# Altium PCB MCU_FOR_DOWNLOAD_V6_8_PCS.PcbDoc (part 2 of 4)
Units mil, origin at the board's own origin, x right, y up, seen from the top; angles counter-clockwise.
Board outline 4834.06 x 3482.15 mil, 4 copper layers (Top, GND1, GND2, Bottom), stack 35.4 mil thick; 280 components, 38 nets, 1144 pads, 944 vias.
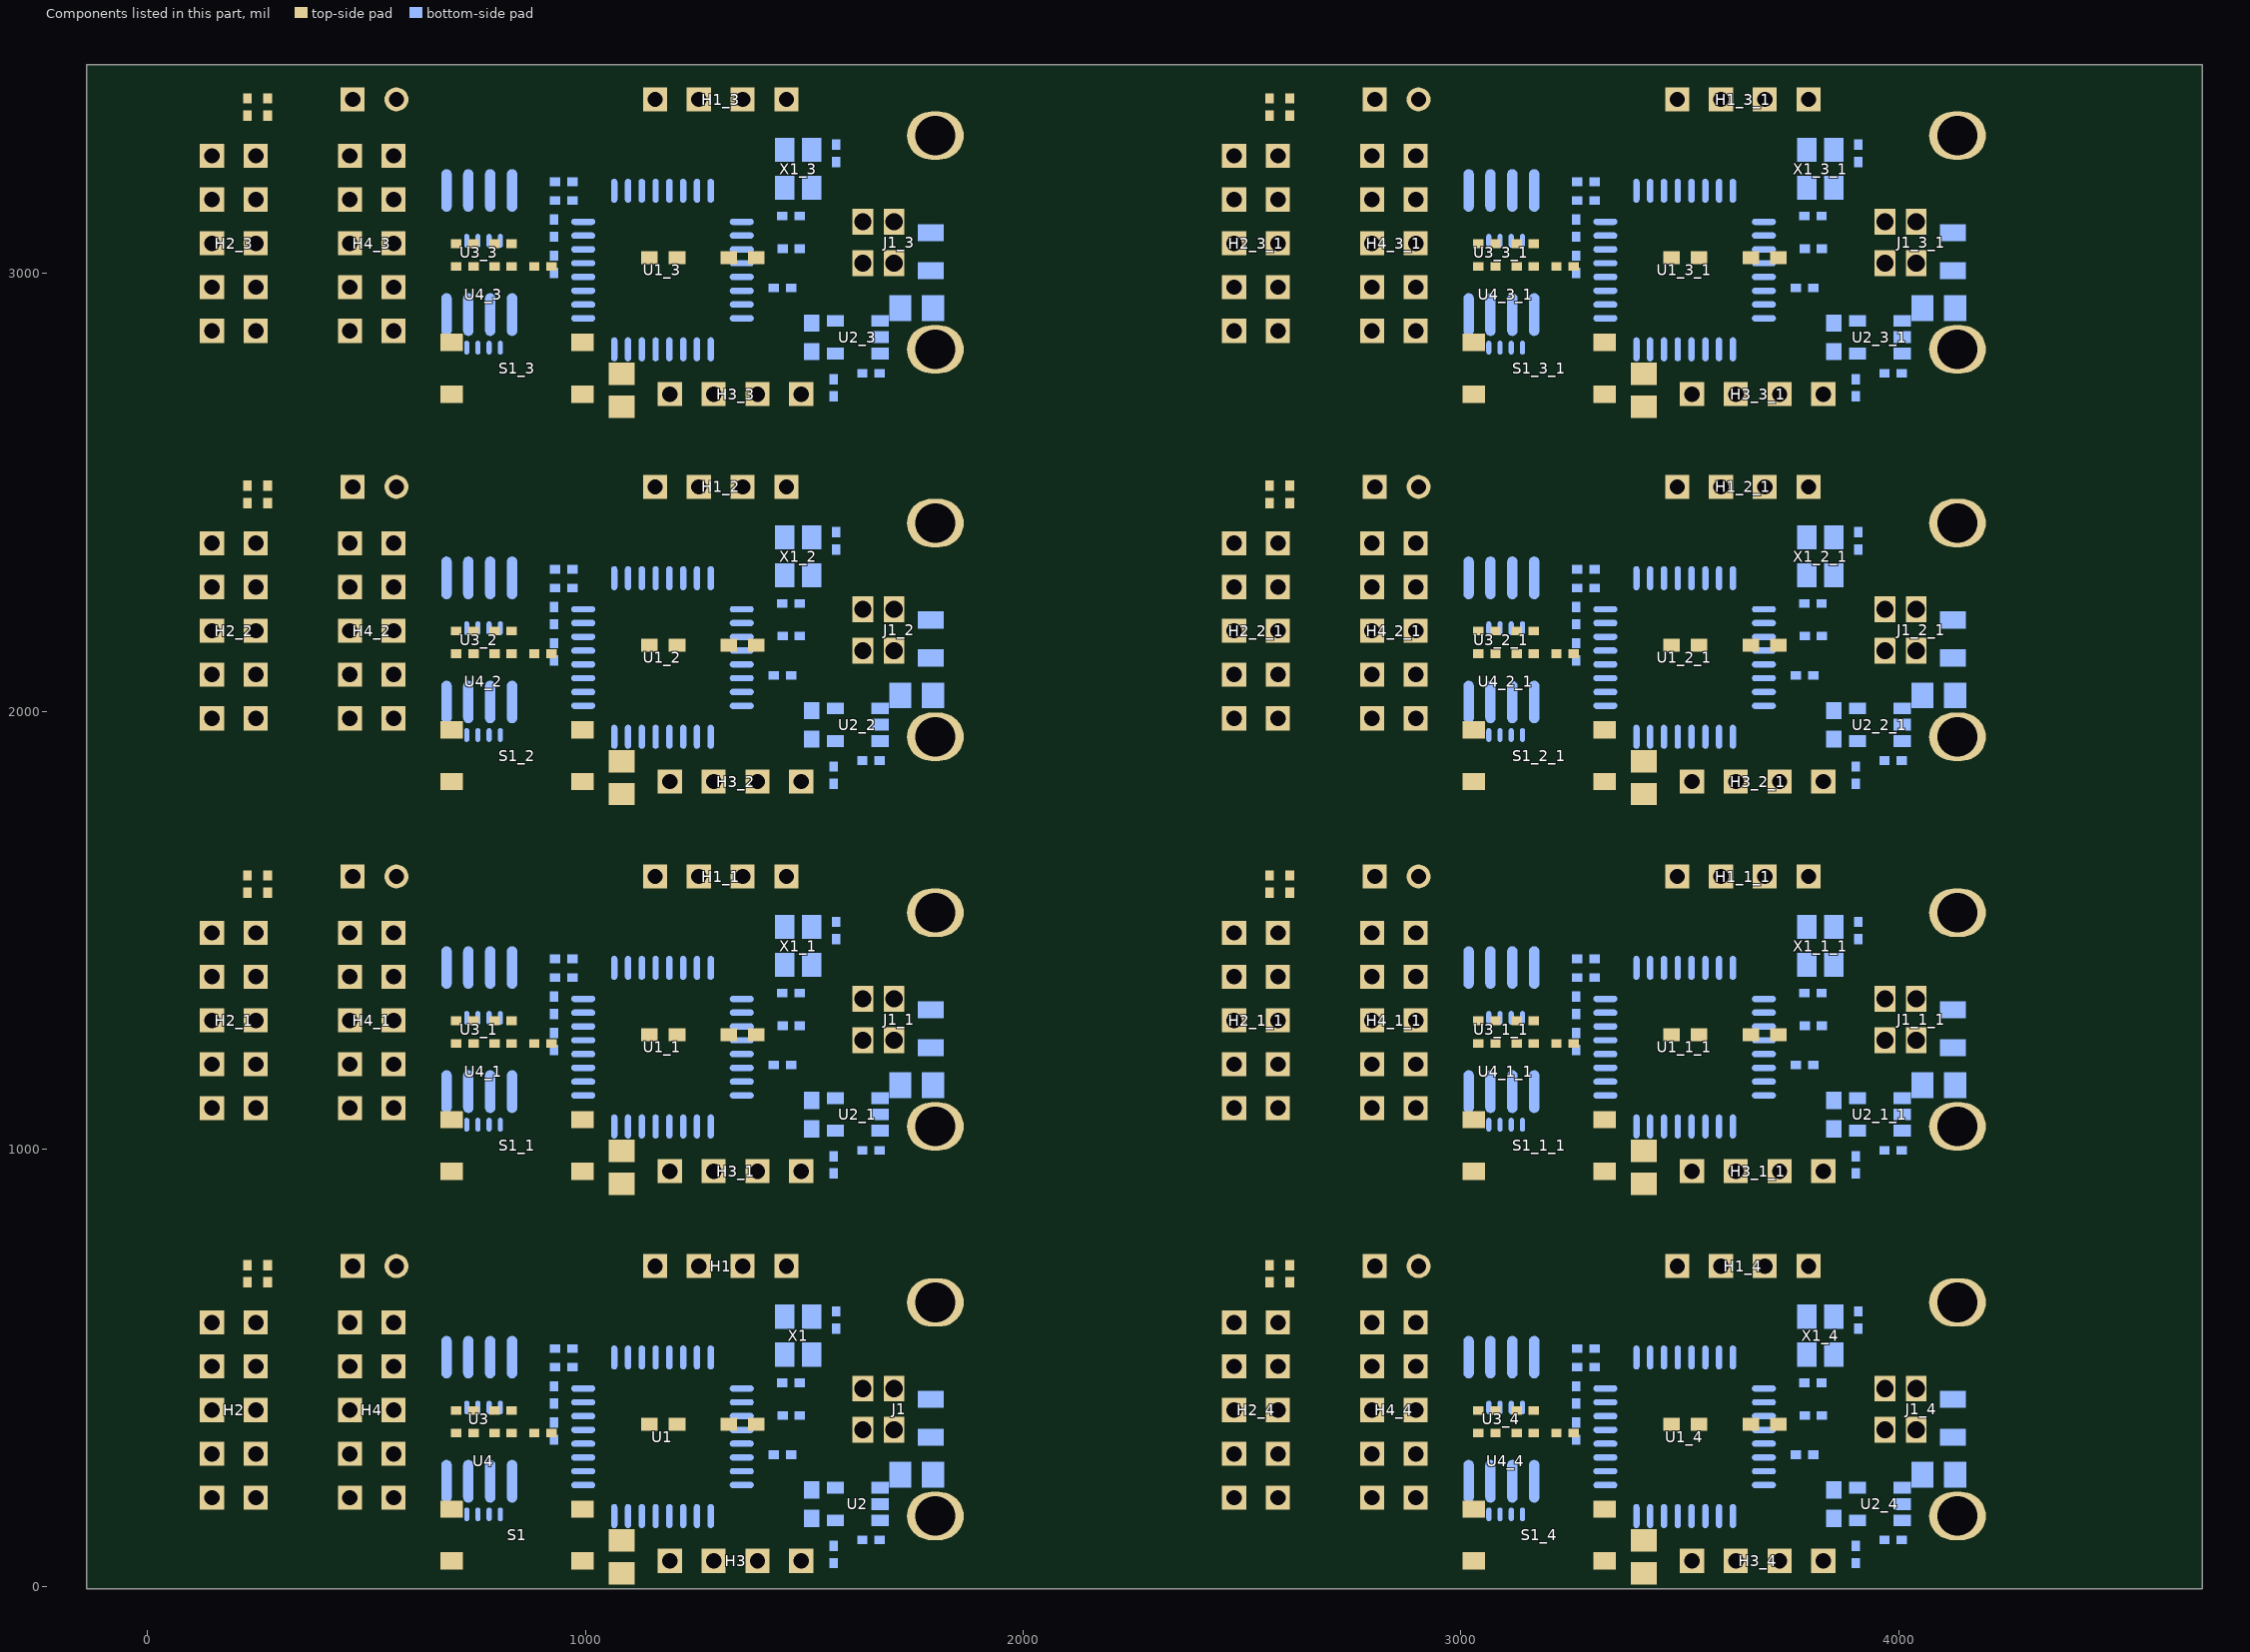
[diagram p2: the components of this part, seen from the top]

## Via types
v1: diameter 16/16/16/16 (per signal layer), hole 8, Top to Bottom, 936 vias
v2: diameter 55/55/55/55 (per signal layer), hole 37, Top to Bottom, 8 vias

## Nets (pads, with @x,y where several pads share a name; then routed paths per layer and width w, separated by ;. In a path a pad name is that pad's centre, name@x,y a point inside that pad or via, vN(x,y) a via of type N, cw(c..) or ccw(c..) an arc to the next point about the centre after c; other vN are vias at no path point) (continued)
copper on no net: | length 208596.2
  Top w7.87: v1(41.34,1641.97) 79.53,1680.16 644.09,1680.16 648.03,1676.22 v1(648.03,1673.07) ; v1(41.34,2531.97) 79.53,2570.16 644.09,2570.16 648.03,2566.22 v1(648.03,2563.07) ; v1(41.34,3416.97) 79.53,3455.16 644.09,3455.16 648.03,3451.22 v1(648.03,3448.07) ; 67.32,1585.28 69.69,1585.28 ; 67.32,2475.28 69.69,2475.28 ; 67.32,3360.28 69.69,3360.28 ; 146.85,1093.54 194.88,1141.57 329.92,1141.57 422.44,1049.06 594.49,1049.06 656.3,1110.87 1048.03,1110.87 v1(1074.41,1084.49) ; 146.85,1193.54 146.85,1194.72 192.52,1240.39 322.34,1240.39 409.45,1153.29 605.02,1153.29 617.32,1140.98 1081.69,1140.98 v1(1127.95,1094.72) ; 146.85,1493.54 149.2,1493.54 203.54,1439.2 203.54,1437.24 292.52,1437.24 314.57,1415.2 314.57,1344.33 425.59,1233.31 597.05,1233.31 674.8,1155.55 1155.71,1155.55 v1(1222.44,1088.82) ; 146.85,1983.54 194.88,2031.57 329.92,2031.57 422.44,1939.06 594.49,1939.06 656.3,2000.87 1048.03,2000.87 v1(1074.41,1974.49) ; 146.85,2083.54 146.85,2084.72 192.52,2130.39 322.34,2130.39 409.45,2043.29 605.02,2043.29 617.32,2030.98 1081.69,2030.98 v1(1127.95,1984.72) ; 146.85,2383.54 149.2,2383.54 203.54,2329.2 203.54,2327.24 292.52,2327.24 314.57,2305.2 314.57,2234.33 425.59,2123.31 597.05,2123.31 674.8,2045.55 1155.71,2045.55 v1(1222.44,1978.82) ; 146.85,2868.54 194.88,2916.57 329.92,2916.57 422.44,2824.06 594.49,2824.06 656.3,2885.87 1048.03,2885.87 v1(1074.41,2859.49) ; 146.85,2968.54 146.85,2969.72 192.52,3015.39 322.34,3015.39 409.45,2928.29 605.02,2928.29 617.32,2915.98 1081.69,2915.98 v1(1127.95,2869.72) ; 146.85,3268.54 149.2,3268.54 203.54,3214.2 203.54,3212.24 292.52,3212.24 314.57,3190.2 314.57,3119.33 425.59,3008.31 597.05,3008.31 674.8,2930.55 1155.71,2930.55 v1(1222.44,2863.82) ; v1(196.85,1054.96) 202.76,1054.96 238.58,1019.13 622.83,1019.13 v1@648.83,1045.13 ; v1(196.85,1944.96) 202.76,1944.96 238.58,1909.13 622.83,1909.13 v1@648.83,1935.13 ; v1(196.85,2829.96) 202.76,2829.96 238.58,2794.13 622.83,2794.13 v1@648.83,2820.13 ; 227.95,1624.65 274.02,1624.65 251.18,1601.81 251.18,1501.02 246.85,1496.69 246.85,1493.54 ; 227.95,2514.65 274.02,2514.65 251.18,2491.81 251.18,2391.02 246.85,2386.69 246.85,2383.54 ; 227.95,3399.65 274.02,3399.65 251.18,3376.81 251.18,3276.02 246.85,3271.69 246.85,3268.54 ; 246.85,1093.54 251.68,1093.54 255.02,1090.2 257.58,1090.2 314.17,1033.6 600.39,1033.6 663.78,1096.99 1025.89,1096.99 1059.65,1063.23 1135.33,1063.23 1156.59,1084.49 1156.99,1084.49 1156.99,1088.33 v1(1159.45,1090.79) ; 246.85,1193.54 327.17,1193.54 327.36,1193.74 385.83,1135.28 599.21,1135.28 609.06,1125.43 1063.78,1125.43 v1(1096.46,1092.76) ; 246.85,1983.54 251.68,1983.54 255.02,1980.2 257.58,1980.2 314.17,1923.6 600.39,1923.6 663.78,1986.99 1025.89,1986.99 1059.65,1953.23 1135.33,1953.23 1156.59,1974.49 1156.99,1974.49 1156.99,1978.33 v1(1159.45,1980.79) ; 246.85,2083.54 327.17,2083.54 327.36,2083.74 385.83,2025.28 599.21,2025.28 609.06,2015.43 1063.78,2015.43 v1(1096.46,1982.76) ; 246.85,2868.54 251.68,2868.54 255.02,2865.2 257.58,2865.2 314.17,2808.6 600.39,2808.6 663.78,2871.99 1025.89,2871.99 1059.65,2838.23 1135.33,2838.23 1156.59,2859.49 1156.99,2859.49 1156.99,2863.33 v1(1159.45,2865.79) ; 246.85,2968.54 327.17,2968.54 327.36,2968.74 385.83,2910.28 599.21,2910.28 609.06,2900.43 1063.78,2900.43 v1(1096.46,2867.76) ; 274.02,1585.28 316.14,1585.28 381.89,1519.53 381.89,1374.25 411.42,1344.72 v1(600.39,1344.72) 701.97,1243.15 701.97,1241.18 701.97,1232.52 706.5,1227.99 ; 274.02,2475.28 316.14,2475.28 381.89,2409.53 381.89,2264.25 411.42,2234.72 v1(600.39,2234.72) 701.97,2133.15 701.97,2131.18 701.97,2122.52 706.5,2117.99 ; 274.02,3360.28 316.14,3360.28 381.89,3294.53 381.89,3149.25 411.42,3119.72 v1(600.39,3119.72) 701.97,3018.15 701.97,3016.18 701.97,3007.52 706.5,3002.99 ; 461.81,1493.54 460.63,1493.54 458.27,1491.18 458.86,1490.59 497.24,1452.2 759.45,1452.2 826.77,1384.88 869.29,1384.88 v1(872.05,1382.13) ; 461.81,2383.54 460.63,2383.54 458.27,2381.18 458.86,2380.59 497.24,2342.2 759.45,2342.2 826.77,2274.88 869.29,2274.88 v1(872.05,2272.13) ; 461.81,3268.54 460.63,3268.54 458.27,3266.18 458.86,3265.59 497.24,3227.2 759.45,3227.2 826.77,3159.88 869.29,3159.88 v1(872.05,3157.13) ; v1(692.91,1187.24) 693.31,1187.24 710.63,1169.92 1176.77,1169.92 v1(1185.04,1161.65) ; v1(692.91,1360.47) v1(1149.61,1360.47) ; v1(692.91,2077.24) 693.31,2077.24 710.63,2059.92 1176.77,2059.92 v1(1185.04,2051.65) ; v1(692.91,2250.47) v1(1149.61,2250.47) ; v1(692.91,2962.24) 693.31,2962.24 710.63,2944.92 1176.77,2944.92 v1(1185.04,2936.65) ; v1(692.91,3135.47) v1(1149.61,3135.47) ; 704.72,1241.18 706.5,1239.41 706.5,1227.99 ; 704.72,1292.76 704.72,1320.31 725.2,1340.79 874.8,1340.79 ; 704.72,2131.18 706.5,2129.41 706.5,2117.99 ; 704.72,2182.76 704.72,2210.31 725.2,2230.79 874.8,2230.79 ; 704.72,3016.18 706.5,3014.41 706.5,3002.99 ; 704.72,3067.76 704.72,3095.31 725.2,3115.79 874.8,3115.79 ; 744.09,1241.18 744.09,1292.76 744.09,1313.62 751.18,1320.71 753.54,1320.71 v1(753.94,1321.1) ; 744.09,2131.18 744.09,2182.76 744.09,2203.62 751.18,2210.71 753.54,2210.71 v1(753.94,2211.1) ; 744.09,3016.18 744.09,3067.76 744.09,3088.62 751.18,3095.71 753.54,3095.71 v1(753.94,3096.1) ; v1(783.46,1321.1) 803.15,1321.1 831.5,1292.76 ; v1(783.46,2211.1) 803.15,2211.1 831.5,2182.76 ; v1(783.46,3096.1) 803.15,3096.1 831.5,3067.76 ; v1(791.34,1210.87) 795.67,1206.54 795.67,1206.34 1225.2,1206.34 1261.42,1242.56 1261.42,1295.12 v1(1309.06,1342.76) ; v1(791.34,2100.87) 795.67,2096.54 795.67,2096.34 1225.2,2096.34 1261.42,2132.56 1261.42,2185.12 v1(1309.06,2232.76) ; v1(791.34,2985.87) 795.67,2981.54 795.67,2981.34 1225.2,2981.34 1261.42,3017.56 1261.42,3070.12 v1(1309.06,3117.76) ; 792.13,1241.18 792.13,1242.76 828.74,1279.37 828.74,1291.22 829.12,1291.59 829.12,1291.95 ; 792.13,1292.76 790.55,1292.76 767.5,1269.7 767.5,1240.79 767.13,1191.57 766.54,1188.43 ; 792.13,2131.18 792.13,2132.76 828.74,2169.37 828.74,2181.22 829.12,2181.59 829.12,2181.95 ; 792.13,2182.76 790.55,2182.76 767.5,2159.7 767.5,2130.79 767.13,2081.57 766.54,2078.43 ; 792.13,3016.18 792.13,3017.76 828.74,3054.37 828.74,3066.22 829.12,3066.59 829.12,3066.95 ; 792.13,3067.76 790.55,3067.76 767.5,3044.7 767.5,3015.79 767.13,2966.57 766.54,2963.43 ; 831.5,1241.18 832.28,1240.39 832.28,1238.03 838.39,1231.93 838.39,1230.75 v1(844.49,1224.65) ; 831.5,2131.18 832.28,2130.39 832.28,2128.03 838.39,2121.93 838.39,2120.75 v1(844.49,2114.65) ; 831.5,3016.18 832.28,3015.39 832.28,3013.03 838.39,3006.93 838.39,3005.75 v1(844.49,2999.65) ; 874.8,1241.57 874.8,1340.79 ; 874.8,2131.57 874.8,2230.79 ; 874.8,3016.57 874.8,3115.79 ; v1(893.7,1269.92) 922.44,1241.18 ; v1(893.7,2159.92) 922.44,2131.18 ; v1(893.7,3044.92) 922.44,3016.18 ; v1(944.88,1069.13) 991.34,1069.13 993.31,1067.17 ; v1(944.88,1959.13) 991.34,1959.13 993.31,1957.17 ; v1(944.88,2844.13) 991.34,2844.13 993.31,2842.17 ; v1(948.82,1265.98) 1143.31,1265.98 1146.17,1263.13 1146.17,1260.87 ; v1(948.82,2155.98) 1143.31,2155.98 1146.17,2153.13 1146.17,2150.87 ; v1(948.82,3040.98) 1143.31,3040.98 1146.17,3038.13 1146.17,3035.87 ; v1(1191.73,1378.98) 1192.52,1378.19 1192.52,1372.68 1160.63,1340.79 874.8,1340.79 ; v1(1191.73,2268.98) 1192.52,2268.19 1192.52,2262.68 1160.63,2230.79 874.8,2230.79 ; v1(1191.73,3153.98) 1192.52,3153.19 1192.52,3147.68 1160.63,3115.79 874.8,3115.79 ; v1(1222.44,1122.28) 1223.62,1123.46 1283.86,1123.46 1309.65,1097.68 1583.27,1097.68 1639.76,1041.18 1640.16,1041.57 v1(1702.76,1041.57) ; v1(1222.44,2012.28) 1223.62,2013.46 1283.86,2013.46 1309.65,1987.68 1583.27,1987.68 1639.76,1931.18 1640.16,1931.57 v1(1702.76,1931.57) ; v1(1222.44,2897.28) 1223.62,2898.46 1283.86,2898.46 1309.65,2872.68 1583.27,2872.68 1639.76,2816.18 1640.16,2816.57 v1(1702.76,2816.57) ; v1(1263.78,1096.69) 1263.39,1082.13 1218.9,1037.64 v1(944.88,1037.64) 660.24,1037.64 649.21,1044.89 v1@648.83,1045.13 ; v1(1263.78,1986.69) 1263.39,1972.13 1218.9,1927.64 v1(944.88,1927.64) 660.24,1927.64 649.21,1934.89 v1@648.83,1935.13 ; v1(1263.78,2871.69) 1263.39,2857.13 1218.9,2812.64 v1(944.88,2812.64) 660.24,2812.64 649.21,2819.89 v1@648.83,2820.13 ; v1(1311.02,1311.26) 1309.45,1312.83 1305.12,1312.83 1301.77,1309.49 1300.98,1309.49 1280.51,1289.02 1280.51,1216.57 1252.36,1188.43 766.54,1188.43 ; v1(1311.02,2201.26) 1309.45,2202.83 1305.12,2202.83 1301.77,2199.49 1300.98,2199.49 1280.51,2179.02 1280.51,2106.57 1252.36,2078.43 766.54,2078.43 ; v1(1311.02,3086.26) 1309.45,3087.83 1305.12,3087.83 1301.77,3084.49 1300.98,3084.49 1280.51,3064.02 1280.51,2991.57 1252.36,2963.43 766.54,2963.43 ; v1(1322.83,1286.06) 1327.27,1281.63 1327.27,1260.87 ; v1(1322.83,2176.06) 1327.27,2171.63 1327.27,2150.87 ; v1(1322.83,3061.06) 1327.27,3056.63 1327.27,3035.87 ; 1390.26,1260.87 1390.26,1262.44 1405.91,1262.44 v1(1425.2,1281.73) ; 1390.26,2150.87 1390.26,2152.44 1405.91,2152.44 v1(1425.2,2171.73) ; 1390.26,3035.87 1390.26,3037.44 1405.91,3037.44 v1(1425.2,3056.73) ; v1(2376.34,751.97) 2414.53,790.16 2979.09,790.16 2983.03,786.22 v1(2983.03,783.07) ; v1(2376.34,1641.97) 2414.53,1680.16 2979.09,1680.16 2983.03,1676.22 v1(2983.03,1673.07) ; v1(2376.34,2531.97) 2414.53,2570.16 2979.09,2570.16 2983.03,2566.22 v1(2983.03,2563.07) ; v1(2376.34,3416.97) 2414.53,3455.16 2979.09,3455.16 2983.03,3451.22 v1(2983.03,3448.07) ; 2402.32,695.28 2404.69,695.28 ; 2402.32,1585.28 2404.69,1585.28 ; 2402.32,2475.28 2404.69,2475.28 ; 2402.32,3360.28 2404.69,3360.28 ; 2481.85,203.54 2529.88,251.57 2664.92,251.57 2757.44,159.06 2929.49,159.06 2991.3,220.87 3383.03,220.87 v1(3409.41,194.49) ; 2481.85,303.54 2481.85,304.72 2527.52,350.39 2657.34,350.39 2744.45,263.29 2940.02,263.29 2952.32,250.98 3416.69,250.98 v1(3462.95,204.72) ; 2481.85,603.54 2484.2,603.54 2538.54,549.2 2538.54,547.24 2627.52,547.24 2649.57,525.2 2649.57,454.33 2760.59,343.31 2932.05,343.31 3009.8,265.55 3490.71,265.55 v1(3557.44,198.82) ; 2481.85,1093.54 2529.88,1141.57 2664.92,1141.57 2757.44,1049.06 2929.49,1049.06 2991.3,1110.87 3383.03,1110.87 v1(3409.41,1084.49) ; 2481.85,1193.54 2481.85,1194.72 2527.52,1240.39 2657.34,1240.39 2744.45,1153.29 2940.02,1153.29 2952.32,1140.98 3416.69,1140.98 v1(3462.95,1094.72) ; 2481.85,1493.54 2484.2,1493.54 2538.54,1439.2 2538.54,1437.24 2627.52,1437.24 2649.57,1415.2 2649.57,1344.33 2760.59,1233.31 2932.05,1233.31 3009.8,1155.55 3490.71,1155.55 v1(3557.44,1088.82) ; 2481.85,1983.54 2529.88,2031.57 2664.92,2031.57 2757.44,1939.06 2929.49,1939.06 2991.3,2000.87 3383.03,2000.87 v1(3409.41,1974.49) ; 2481.85,2083.54 2481.85,2084.72 2527.52,2130.39 2657.34,2130.39 2744.45,2043.29 2940.02,2043.29 2952.32,2030.98 3416.69,2030.98 v1(3462.95,1984.72) ; 2481.85,2383.54 2484.2,2383.54 2538.54,2329.2 2538.54,2327.24 2627.52,2327.24 2649.57,2305.2 2649.57,2234.33 2760.59,2123.31 2932.05,2123.31 3009.8,2045.55 3490.71,2045.55 v1(3557.44,1978.82) ; 2481.85,2868.54 2529.88,2916.57 2664.92,2916.57 2757.44,2824.06 2929.49,2824.06 2991.3,2885.87 3383.03,2885.87 v1(3409.41,2859.49) ; 2481.85,2968.54 2481.85,2969.72 2527.52,3015.39 2657.34,3015.39 2744.45,2928.29 2940.02,2928.29 2952.32,2915.98 3416.69,2915.98 v1(3462.95,2869.72) ; 2481.85,3268.54 2484.2,3268.54 2538.54,3214.2 2538.54,3212.24 2627.52,3212.24 2649.57,3190.2 2649.57,3119.33 2760.59,3008.31 2932.05,3008.31 3009.8,2930.55 3490.71,2930.55 v1(3557.44,2863.82) ; v1(2531.85,164.96) 2537.76,164.96 2573.58,129.13 2957.83,129.13 v1@2983.83,155.13 ; v1(2531.85,1054.96) 2537.76,1054.96 2573.58,1019.13 2957.83,1019.13 v1@2983.83,1045.13 ; v1(2531.85,1944.96) 2537.76,1944.96 2573.58,1909.13 2957.83,1909.13 v1@2983.83,1935.13 ; v1(2531.85,2829.96) 2537.76,2829.96 2573.58,2794.13 2957.83,2794.13 v1@2983.83,2820.13 ; 2562.95,734.65 2609.02,734.65 2586.18,711.81 2586.18,611.02 2581.85,606.69 2581.85,603.54 ; 2562.95,1624.65 2609.02,1624.65 2586.18,1601.81 2586.18,1501.02 2581.85,1496.69 2581.85,1493.54 ; 2562.95,2514.65 2609.02,2514.65 2586.18,2491.81 2586.18,2391.02 2581.85,2386.69 2581.85,2383.54 ; 2562.95,3399.65 2609.02,3399.65 2586.18,3376.81 2586.18,3276.02 2581.85,3271.69 2581.85,3268.54 ; 2581.85,203.54 2586.68,203.54 2590.02,200.2 2592.58,200.2 2649.17,143.6 2935.39,143.6 2998.78,206.99 3360.89,206.99 3394.65,173.23 3470.33,173.23 3491.59,194.49 3491.99,194.49 3491.99,198.33 v1(3494.45,200.79) ; 2581.85,303.54 2662.17,303.54 2662.36,303.74 2720.83,245.28 2934.21,245.28 2944.06,235.43 3398.78,235.43 v1(3431.46,202.76) ; 2581.85,1093.54 2586.68,1093.54 2590.02,1090.2 2592.58,1090.2 2649.17,1033.6 2935.39,1033.6 2998.78,1096.99 3360.89,1096.99 3394.65,1063.23 3470.33,1063.23 3491.59,1084.49 3491.99,1084.49 3491.99,1088.33 v1(3494.45,1090.79) ; 2581.85,1193.54 2662.17,1193.54 2662.36,1193.74 2720.83,1135.28 2934.21,1135.28 2944.06,1125.43 3398.78,1125.43 v1(3431.46,1092.76) ; 2581.85,1983.54 2586.68,1983.54 2590.02,1980.2 2592.58,1980.2 2649.17,1923.6 2935.39,1923.6 2998.78,1986.99 3360.89,1986.99 3394.65,1953.23 3470.33,1953.23 3491.59,1974.49 3491.99,1974.49 3491.99,1978.33 v1(3494.45,1980.79) ; 2581.85,2083.54 2662.17,2083.54 2662.36,2083.74 2720.83,2025.28 2934.21,2025.28 2944.06,2015.43 3398.78,2015.43 v1(3431.46,1982.76) ; 2581.85,2868.54 2586.68,2868.54 2590.02,2865.2 2592.58,2865.2 2649.17,2808.6 2935.39,2808.6 2998.78,2871.99 3360.89,2871.99 3394.65,2838.23 3470.33,2838.23 3491.59,2859.49 3491.99,2859.49 3491.99,2863.33 v1(3494.45,2865.79) ; 2581.85,2968.54 2662.17,2968.54 2662.36,2968.74 2720.83,2910.28 2934.21,2910.28 2944.06,2900.43 3398.78,2900.43 v1(3431.46,2867.76) ; 2609.02,695.28 2651.14,695.28 2716.89,629.53 2716.89,484.25 2746.42,454.72 v1(2935.39,454.72) 3036.97,353.15 3036.97,351.18 3036.97,342.52 3041.5,337.99 ; 2609.02,1585.28 2651.14,1585.28 2716.89,1519.53 2716.89,1374.25 2746.42,1344.72 v1(2935.39,1344.72) 3036.97,1243.15 3036.97,1241.18 3036.97,1232.52 3041.5,1227.99 ; 2609.02,2475.28 2651.14,2475.28 2716.89,2409.53 2716.89,2264.25 2746.42,2234.72 v1(2935.39,2234.72) 3036.97,2133.15 3036.97,2131.18 3036.97,2122.52 3041.5,2117.99 ; 2609.02,3360.28 2651.14,3360.28 2716.89,3294.53 2716.89,3149.25 2746.42,3119.72 v1(2935.39,3119.72) 3036.97,3018.15 3036.97,3016.18 3036.97,3007.52 3041.5,3002.99 ; 2796.81,603.54 2795.63,603.54 2793.27,601.18 2793.86,600.59 2832.24,562.2 3094.45,562.2 3161.77,494.88 3204.29,494.88 v1(3207.05,492.13) ; 2796.81,1493.54 2795.63,1493.54 2793.27,1491.18 2793.86,1490.59 2832.24,1452.2 3094.45,1452.2 3161.77,1384.88 3204.29,1384.88 v1(3207.05,1382.13) ; 2796.81,2383.54 2795.63,2383.54 2793.27,2381.18 2793.86,2380.59 2832.24,2342.2 3094.45,2342.2 3161.77,2274.88 3204.29,2274.88 v1(3207.05,2272.13) ; 2796.81,3268.54 2795.63,3268.54 2793.27,3266.18 2793.86,3265.59 2832.24,3227.2 3094.45,3227.2 3161.77,3159.88 3204.29,3159.88 v1(3207.05,3157.13) ; v1(3027.91,297.24) 3028.31,297.24 3045.63,279.92 3511.77,279.92 v1(3520.04,271.65) ; v1(3027.91,470.47) v1(3484.61,470.47) ; v1(3027.91,1187.24) 3028.31,1187.24 3045.63,1169.92 3511.77,1169.92 v1(3520.04,1161.65) ; v1(3027.91,1360.47) v1(3484.61,1360.47) ; v1(3027.91,2077.24) 3028.31,2077.24 3045.63,2059.92 3511.77,2059.92 v1(3520.04,2051.65) ; v1(3027.91,2250.47) v1(3484.61,2250.47) ; v1(3027.91,2962.24) 3028.31,2962.24 3045.63,2944.92 3511.77,2944.92 v1(3520.04,2936.65) ; v1(3027.91,3135.47) v1(3484.61,3135.47) ; 3039.72,351.18 3041.5,349.41 3041.5,337.99 ; 3039.72,402.76 3039.72,430.31 3060.2,450.79 3209.8,450.79 ; 3039.72,1241.18 3041.5,1239.41 3041.5,1227.99 ; 3039.72,1292.76 3039.72,1320.31 3060.2,1340.79 3209.8,1340.79 ; 3039.72,2131.18 3041.5,2129.41 3041.5,2117.99 ; 3039.72,2182.76 3039.72,2210.31 3060.2,2230.79 3209.8,2230.79 ; 3039.72,3016.18 3041.5,3014.41 3041.5,3002.99 ; 3039.72,3067.76 3039.72,3095.31 3060.2,3115.79 3209.8,3115.79 ; 3079.09,351.18 3079.09,402.76 3079.09,423.62 3086.18,430.71 3088.54,430.71 v1(3088.94,431.1) ; 3079.09,1241.18 3079.09,1292.76 3079.09,1313.62 3086.18,1320.71 3088.54,1320.71 v1(3088.94,1321.1) ; 3079.09,2131.18 3079.09,2182.76 3079.09,2203.62 3086.18,2210.71 3088.54,2210.71 v1(3088.94,2211.1) ; 3079.09,3016.18 3079.09,3067.76 3079.09,3088.62 3086.18,3095.71 3088.54,3095.71 v1(3088.94,3096.1) ; v1(3118.46,431.1) 3138.15,431.1 3166.5,402.76 ; v1(3118.46,1321.1) 3138.15,1321.1 3166.5,1292.76 ; v1(3118.46,2211.1) 3138.15,2211.1 3166.5,2182.76 ; v1(3118.46,3096.1) 3138.15,3096.1 3166.5,3067.76 ; v1(3126.34,320.87) 3130.67,316.54 3130.67,316.34 3560.2,316.34 3596.42,352.56 3596.42,405.12 v1(3644.06,452.76) ; v1(3126.34,1210.87) 3130.67,1206.54 3130.67,1206.34 3560.2,1206.34 3596.42,1242.56 3596.42,1295.12 v1(3644.06,1342.76) ; v1(3126.34,2100.87) 3130.67,2096.54 3130.67,2096.34 3560.2,2096.34 3596.42,2132.56 3596.42,2185.12 v1(3644.06,2232.76) ; v1(3126.34,2985.87) 3130.67,2981.54 3130.67,2981.34 3560.2,2981.34 3596.42,3017.56 3596.42,3070.12 v1(3644.06,3117.76) ; 3127.13,351.18 3127.13,352.76 3163.74,389.37 3163.74,401.22 3164.12,401.59 3164.12,401.95 ; 3127.13,402.76 3125.55,402.76 3102.5,379.7 3102.5,350.79 3102.13,301.57 3101.54,298.43 ; 3127.13,1241.18 3127.13,1242.76 3163.74,1279.37 3163.74,1291.22 3164.12,1291.59 3164.12,1291.95 ; 3127.13,1292.76 3125.55,1292.76 3102.5,1269.7 3102.5,1240.79 3102.13,1191.57 3101.54,1188.43 ; 3127.13,2131.18 3127.13,2132.76 3163.74,2169.37 3163.74,2181.22 3164.12,2181.59 3164.12,2181.95 ; 3127.13,2182.76 3125.55,2182.76 3102.5,2159.7 3102.5,2130.79 3102.13,2081.57 3101.54,2078.43 ; 3127.13,3016.18 3127.13,3017.76 3163.74,3054.37 3163.74,3066.22 3164.12,3066.59 3164.12,3066.95 ; 3127.13,3067.76 3125.55,3067.76 3102.5,3044.7 3102.5,3015.79 3102.13,2966.57 3101.54,2963.43 ; 3166.5,351.18 3167.28,350.39 3167.28,348.03 3173.39,341.93 3173.39,340.75 v1(3179.49,334.65) ; 3166.5,1241.18 3167.28,1240.39 3167.28,1238.03 3173.39,1231.93 3173.39,1230.75 v1(3179.49,1224.65) ; 3166.5,2131.18 3167.28,2130.39 3167.28,2128.03 3173.39,2121.93 3173.39,2120.75 v1(3179.49,2114.65) ; 3166.5,3016.18 3167.28,3015.39 3167.28,3013.03 3173.39,3006.93 3173.39,3005.75 v1(3179.49,2999.65) ; 3209.8,351.57 3209.8,450.79 ; 3209.8,1241.57 3209.8,1340.79 ; 3209.8,2131.57 3209.8,2230.79 ; 3209.8,3016.57 3209.8,3115.79 ; v1(3228.7,379.92) 3257.44,351.18 ; v1(3228.7,1269.92) 3257.44,1241.18 ; v1(3228.7,2159.92) 3257.44,2131.18 ; v1(3228.7,3044.92) 3257.44,3016.18 ; v1(3279.88,179.13) 3326.34,179.13 3328.31,177.17 ; v1(3279.88,1069.13) 3326.34,1069.13 3328.31,1067.17 ; v1(3279.88,1959.13) 3326.34,1959.13 3328.31,1957.17 ; v1(3279.88,2844.13) 3326.34,2844.13 3328.31,2842.17 ; v1(3283.82,375.98) 3478.31,375.98 3481.17,373.13 3481.17,370.87 ; v1(3283.82,1265.98) 3478.31,1265.98 3481.17,1263.13 3481.17,1260.87 ; v1(3283.82,2155.98) 3478.31,2155.98 3481.17,2153.13 3481.17,2150.87 ; v1(3283.82,3040.98) 3478.31,3040.98 3481.17,3038.13 3481.17,3035.87 ; v1(3526.73,488.98) 3527.52,488.19 3527.52,482.68 3495.63,450.79 3209.8,450.79 ; v1(3526.73,1378.98) 3527.52,1378.19 3527.52,1372.68 3495.63,1340.79 3209.8,1340.79 ; v1(3526.73,2268.98) 3527.52,2268.19 3527.52,2262.68 3495.63,2230.79 3209.8,2230.79 ; v1(3526.73,3153.98) 3527.52,3153.19 3527.52,3147.68 3495.63,3115.79 3209.8,3115.79 ; v1(3557.44,232.28) 3558.62,233.46 3618.86,233.46 3644.65,207.68 3918.27,207.68 3974.76,151.18 3975.16,151.57 v1(4037.76,151.57) ; v1(3557.44,1122.28) 3558.62,1123.46 3618.86,1123.46 3644.65,1097.68 3918.27,1097.68 3974.76,1041.18 3975.16,1041.57 v1(4037.76,1041.57) ; v1(3557.44,2012.28) 3558.62,2013.46 3618.86,2013.46 3644.65,1987.68 3918.27,1987.68 3974.76,1931.18 3975.16,1931.57 v1(4037.76,1931.57) ; v1(3557.44,2897.28) 3558.62,2898.46 3618.86,2898.46 3644.65,2872.68 3918.27,2872.68 3974.76,2816.18 3975.16,2816.57 v1(4037.76,2816.57) ; v1(3598.78,206.69) 3598.39,192.13 3553.9,147.64 v1(3279.88,147.64) 2995.24,147.64 2984.21,154.89 v1@2983.83,155.13 ; v1(3598.78,1096.69) 3598.39,1082.13 3553.9,1037.64 v1(3279.88,1037.64) 2995.24,1037.64 2984.21,1044.89 v1@2983.83,1045.13 ; v1(3598.78,1986.69) 3598.39,1972.13 3553.9,1927.64 v1(3279.88,1927.64) 2995.24,1927.64 2984.21,1934.89 v1@2983.83,1935.13 ; v1(3598.78,2871.69) 3598.39,2857.13 3553.9,2812.64 v1(3279.88,2812.64) 2995.24,2812.64 2984.21,2819.89 v1@2983.83,2820.13 ; v1(3646.02,421.26) 3644.45,422.83 3640.12,422.83 3636.77,419.49 3635.98,419.49 3615.51,399.02 3615.51,326.57 3587.36,298.43 3101.54,298.43 ; v1(3646.02,1311.26) 3644.45,1312.83 3640.12,1312.83 3636.77,1309.49 3635.98,1309.49 3615.51,1289.02 3615.51,1216.57 3587.36,1188.43 3101.54,1188.43 ; v1(3646.02,2201.26) 3644.45,2202.83 3640.12,2202.83 3636.77,2199.49 3635.98,2199.49 3615.51,2179.02 3615.51,2106.57 3587.36,2078.43 3101.54,2078.43 ; v1(3646.02,3086.26) 3644.45,3087.83 3640.12,3087.83 3636.77,3084.49 3635.98,3084.49 3615.51,3064.02 3615.51,2991.57 3587.36,2963.43 3101.54,2963.43 ; v1(3657.83,396.06) 3662.27,391.63 3662.27,370.87 ; v1(3657.83,1286.06) 3662.27,1281.63 3662.27,1260.87 ; v1(3657.83,2176.06) 3662.27,2171.63 3662.27,2150.87 ; v1(3657.83,3061.06) 3662.27,3056.63 3662.27,3035.87 ; 3725.26,370.87 3725.26,372.44 3740.91,372.44 v1(3760.2,391.73) ; 3725.26,1260.87 3725.26,1262.44 3740.91,1262.44 v1(3760.2,1281.73) ; 3725.26,2150.87 3725.26,2152.44 3740.91,2152.44 v1(3760.2,2171.73) ; 3725.26,3035.87 3725.26,3037.44 3740.91,3037.44 v1(3760.2,3056.73) ; v1@648.83,1045.13 v1(650.39,1046.69) 646.46,1046.69 v1@648.83,1045.13 ; v1@648.83,1935.13 v1(650.39,1936.69) 646.46,1936.69 v1@648.83,1935.13 ; v1@648.83,2820.13 v1(650.39,2821.69) 646.46,2821.69 v1@648.83,2820.13 ; 706.5,1227.99 743.5,1190.98 746.06,1188.43 766.54,1188.43 ; 706.5,2117.99 743.5,2080.98 746.06,2078.43 766.54,2078.43 ; 706.5,3002.99 743.5,2965.98 746.06,2963.43 766.54,2963.43 ; v1@2983.83,155.13 v1(2985.39,156.69) 2981.46,156.69 v1@2983.83,155.13 ; v1@2983.83,1045.13 2981.46,1046.69 v1(2985.39,1046.69) v1@2983.83,1045.13 ; v1@2983.83,1935.13 2981.46,1936.69 v1(2985.39,1936.69) v1@2983.83,1935.13 ; v1@2983.83,2820.13 2981.46,2821.69 v1(2985.39,2821.69) v1@2983.83,2820.13 ; 3041.5,337.99 3078.5,300.98 3081.06,298.43 3101.54,298.43 ; 3041.5,1227.99 3078.5,1190.98 3081.06,1188.43 3101.54,1188.43 ; 3041.5,2117.99 3078.5,2080.98 3081.06,2078.43 3101.54,2078.43 ; 3041.5,3002.99 3078.5,2965.98 3081.06,2963.43 3101.54,2963.43
  Top w11.81: 69.69,1585.28 227.95,1585.28 ; 69.69,2475.28 227.95,2475.28 ; 69.69,3360.28 227.95,3360.28 ; 2404.69,695.28 2562.95,695.28 ; 2404.69,1585.28 2562.95,1585.28 ; 2404.69,2475.28 2562.95,2475.28 ; 2404.69,3360.28 2562.95,3360.28
  Top w19.68: 694.09,1067.17 944.88,1067.17 993.31,1067.17 ; 694.09,1957.17 944.88,1957.17 993.31,1957.17 ; 694.09,2842.17 944.88,2842.17 993.31,2842.17 ; 1083.07,920.63 1083.94,921.5 v1(1137.8,921.5) ; 1083.07,1810.63 1083.94,1811.5 v1(1137.8,1811.5) ; 1083.07,2695.63 1083.94,2696.5 v1(1137.8,2696.5) ; 3029.09,177.17 3279.88,177.17 3328.31,177.17 ; 3029.09,1067.17 3279.88,1067.17 3328.31,1067.17 ; 3029.09,1957.17 3279.88,1957.17 3328.31,1957.17 ; 3029.09,2842.17 3279.88,2842.17 3328.31,2842.17 ; 3418.07,30.63 3418.94,31.5 v1(3472.8,31.5) ; 3418.07,920.63 3418.94,921.5 v1(3472.8,921.5) ; 3418.07,1810.63 3418.94,1811.5 v1(3472.8,1811.5) ; 3418.07,2695.63 3418.94,2696.5 v1(3472.8,2696.5)
  Top w22.05: v1(1035.43,909.69) 1072.13,909.69 1078.39,915.95 1083.07,920.63 ; v1(1035.43,1799.69) 1072.13,1799.69 1078.39,1805.95 1083.07,1810.63 ; v1(1035.43,2684.69) 1072.13,2684.69 1078.39,2690.95 1083.07,2695.63 ; v1(3370.43,19.69) 3407.13,19.69 3413.39,25.95 3418.07,30.63 ; v1(3370.43,909.69) 3407.13,909.69 3413.39,915.95 3418.07,920.63 ; v1(3370.43,1799.69) 3407.13,1799.69 3413.39,1805.95 3418.07,1810.63 ; v1(3370.43,2684.69) 3407.13,2684.69 3413.39,2690.95 3418.07,2695.63
  Top w23.62: 246.85,1393.54 246,1392.69 246,1386.61 205.51,1346.12 205.51,1344.72 67.32,1344.72 ; 246.85,2283.54 246,2282.69 246,2276.61 205.51,2236.12 205.51,2234.72 67.32,2234.72 ; 246.85,3168.54 246,3167.69 246,3161.61 205.51,3121.12 205.51,3119.72 67.32,3119.72 ; 468.11,1622.28 468.11,1623.46 436.61,1654.96 125.2,1654.96 67.32,1597.09 67.32,1585.28 67.32,1344.72 ; 468.11,2512.28 468.11,2513.46 436.61,2544.96 125.2,2544.96 67.32,2487.09 67.32,2475.28 67.32,2234.72 ; 468.11,3397.28 468.11,3398.46 436.61,3429.96 125.2,3429.96 67.32,3372.09 67.32,3360.28 67.32,3119.72 ; 568.11,1622.28 589.17,1601.22 589.57,1601.22 605.12,1585.67 1066.54,1585.67 1231.1,1421.1 1231.1,1384.88 ; 568.11,2512.28 589.17,2491.22 589.57,2491.22 605.12,2475.67 1066.54,2475.67 1231.1,2311.1 1231.1,2274.88 ; 568.11,3397.28 589.17,3376.22 589.57,3376.22 605.12,3360.67 1066.54,3360.67 1231.1,3196.1 1231.1,3159.88 ; 1083.07,995.59 1074.49,1004.17 662.2,1004.17 639.37,981.34 125.2,981.34 67.32,1039.21 67.32,1344.72 ; 1083.07,1885.59 1074.49,1894.17 662.2,1894.17 639.37,1871.34 125.2,1871.34 67.32,1929.21 67.32,2234.72 ; 1083.07,2770.59 1074.49,2779.17 662.2,2779.17 639.37,2756.34 125.2,2756.34 67.32,2814.21 67.32,3119.72 ; 1209.16,1260.87 1231.1,1282.81 1231.1,1384.88 ; 1209.16,2150.87 1231.1,2172.81 1231.1,2274.88 ; 1209.16,3035.87 1231.1,3057.81 1231.1,3159.88 ; v1(1397.64,1185.28) 1490.94,1278.58 v1@1518.9,1278.58 ; v1(1397.64,2075.28) 1490.94,2168.58 v1@1518.9,2168.58 ; v1(1397.64,2960.28) 1490.94,3053.58 v1@1518.9,3053.58 ; v1(1519.69,1277.8) v1@1518.9,1278.58 ; v1(1519.69,2167.8) v1@1518.9,2168.58 ; v1(1519.69,3052.8) v1@1518.9,3053.58 ; 2581.85,503.54 2581,502.69 2581,496.61 2540.51,456.12 2540.51,454.72 2402.32,454.72 ; 2581.85,1393.54 2581,1392.69 2581,1386.61 2540.51,1346.12 2540.51,1344.72 2402.32,1344.72 ; 2581.85,2283.54 2581,2282.69 2581,2276.61 2540.51,2236.12 2540.51,2234.72 2402.32,2234.72 ; 2581.85,3168.54 2581,3167.69 2581,3161.61 2540.51,3121.12 2540.51,3119.72 2402.32,3119.72 ; 2803.11,732.28 2803.11,733.46 2771.61,764.96 2460.2,764.96 2402.32,707.09 2402.32,695.28 2402.32,454.72 ; 2803.11,1622.28 2803.11,1623.46 2771.61,1654.96 2460.2,1654.96 2402.32,1597.09 2402.32,1585.28 2402.32,1344.72 ; 2803.11,2512.28 2803.11,2513.46 2771.61,2544.96 2460.2,2544.96 2402.32,2487.09 2402.32,2475.28 2402.32,2234.72 ; 2803.11,3397.28 2803.11,3398.46 2771.61,3429.96 2460.2,3429.96 2402.32,3372.09 2402.32,3360.28 2402.32,3119.72 ; 2903.11,732.28 2924.17,711.22 2924.57,711.22 2940.12,695.67 3401.54,695.67 3566.1,531.1 3566.1,494.88 ; 2903.11,1622.28 2924.17,1601.22 2924.57,1601.22 2940.12,1585.67 3401.54,1585.67 3566.1,1421.1 3566.1,1384.88 ; 2903.11,2512.28 2924.17,2491.22 2924.57,2491.22 2940.12,2475.67 3401.54,2475.67 3566.1,2311.1 3566.1,2274.88 ; 2903.11,3397.28 2924.17,3376.22 2924.57,3376.22 2940.12,3360.67 3401.54,3360.67 3566.1,3196.1 3566.1,3159.88 ; 3418.07,105.59 3409.49,114.17 2997.2,114.17 2974.37,91.34 2460.2,91.34 2402.32,149.21 2402.32,454.72 ; 3418.07,995.59 3409.49,1004.17 2997.2,1004.17 2974.37,981.34 2460.2,981.34 2402.32,1039.21 2402.32,1344.72 ; 3418.07,1885.59 3409.49,1894.17 2997.2,1894.17 2974.37,1871.34 2460.2,1871.34 2402.32,1929.21 2402.32,2234.72 ; 3418.07,2770.59 3409.49,2779.17 2997.2,2779.17 2974.37,2756.34 2460.2,2756.34 2402.32,2814.21 2402.32,3119.72 ; 3544.16,370.87 3566.1,392.81 3566.1,494.88 ; 3544.16,1260.87 3566.1,1282.81 3566.1,1384.88 ; 3544.16,2150.87 3566.1,2172.81 3566.1,2274.88 ; 3544.16,3035.87 3566.1,3057.81 3566.1,3159.88 ; v1(3732.64,295.28) 3825.94,388.58 v1@3853.9,388.58 ; v1(3732.64,1185.28) 3825.94,1278.58 v1@3853.9,1278.58 ; v1(3732.64,2075.28) 3825.94,2168.58 v1@3853.9,2168.58 ; v1(3732.64,2960.28) 3825.94,3053.58 v1@3853.9,3053.58 ; v1(3854.69,387.8) v1@3853.9,388.58 ; v1(3854.69,1277.8) v1@3853.9,1278.58 ; v1(3854.69,2167.8) v1@3853.9,2168.58 ; v1(3854.69,3052.8) v1@3853.9,3053.58 ; 1231.1,1384.88 1412.6,1384.88 v1@1518.9,1278.58 ; 1231.1,2274.88 1412.6,2274.88 v1@1518.9,2168.58 ; 1231.1,3159.88 1412.6,3159.88 v1@1518.9,3053.58 ; 3566.1,494.88 3747.6,494.88 v1@3853.9,388.58 ; 3566.1,1384.88 3747.6,1384.88 v1@3853.9,1278.58 ; 3566.1,2274.88 3747.6,2274.88 v1@3853.9,2168.58 ; 3566.1,3159.88 3747.6,3159.88 v1@3853.9,3053.58
  Top w31.5: 1083.07,995.59 1095.2,1007.72 1283.86,1007.72 1333.46,1056.54 v2(1348.03,1056.54) ; 1083.07,1885.59 1095.2,1897.72 1283.86,1897.72 1333.46,1946.54 v2(1348.03,1946.54) ; 1083.07,2770.59 1095.2,2782.72 1283.86,2782.72 1333.46,2831.54 v2(1348.03,2831.54) ; 3418.07,105.59 3430.2,117.72 3618.86,117.72 3668.46,166.54 v2(3683.03,166.54) ; 3418.07,995.59 3430.2,1007.72 3618.86,1007.72 3668.46,1056.54 v2(3683.03,1056.54) ; 3418.07,1885.59 3430.2,1897.72 3618.86,1897.72 3668.46,1946.54 v2(3683.03,1946.54) ; 3418.07,2770.59 3430.2,2782.72 3618.86,2782.72 3668.46,2831.54 v2(3683.03,2831.54)